# EAGLE board logic (EAGLE 9.5.2)
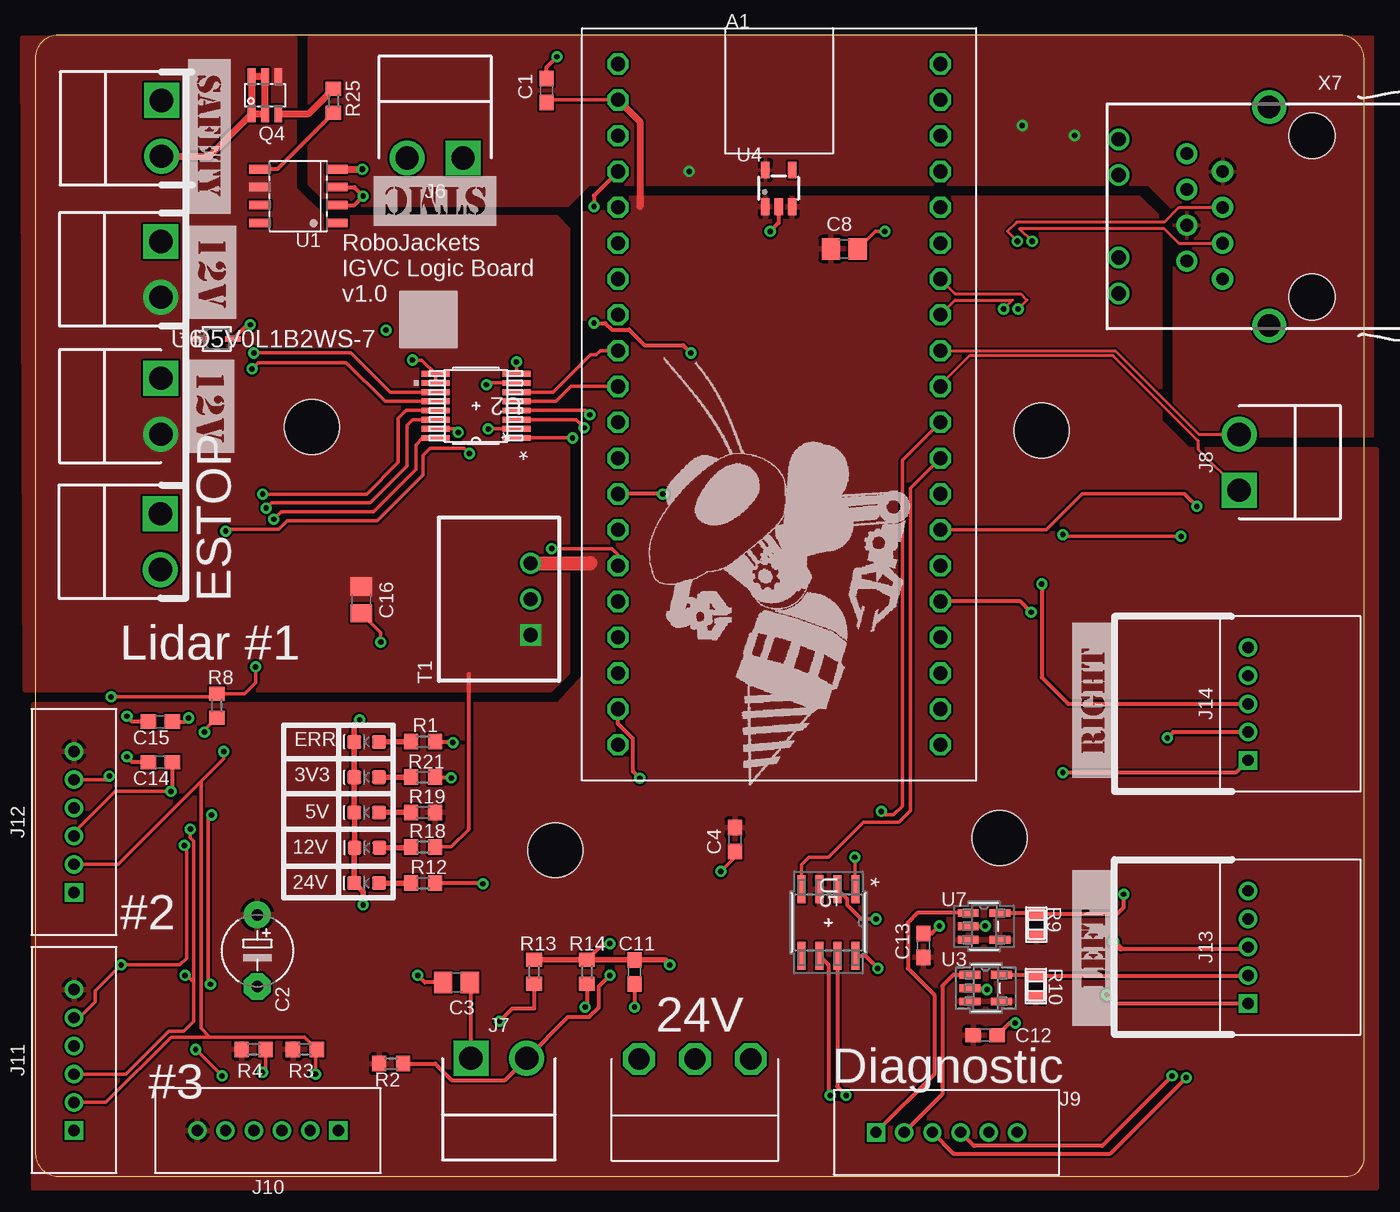
[diagram p0: board, top side]
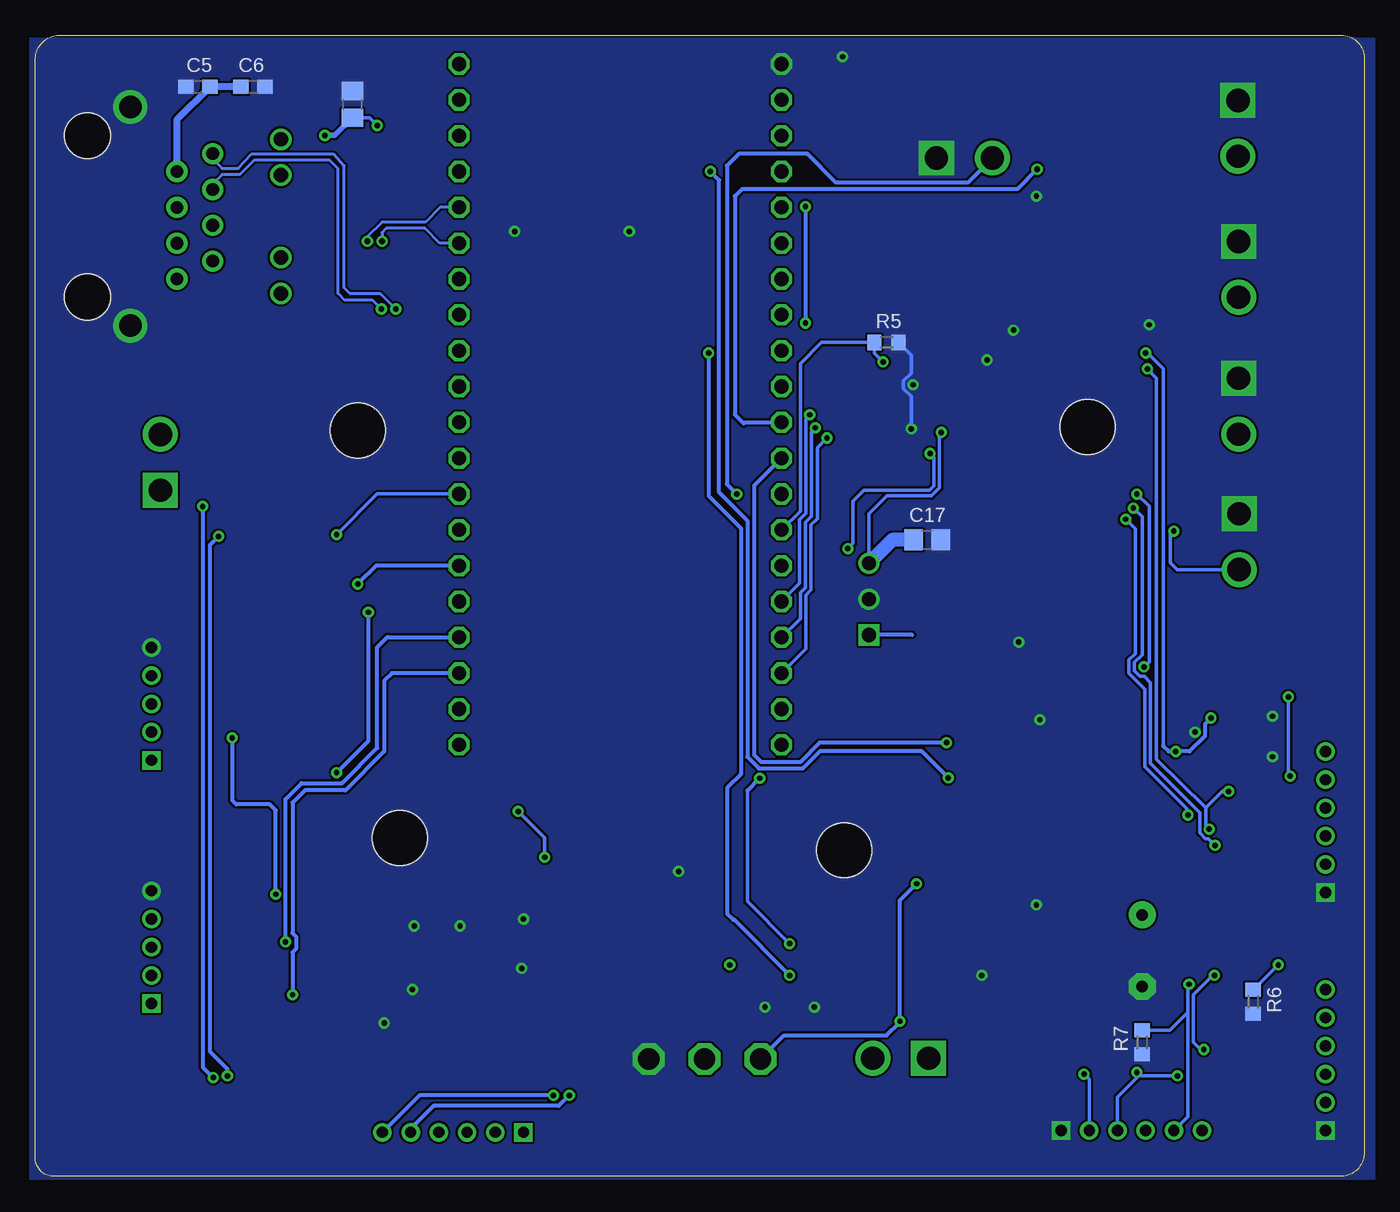
[diagram p1: board, bottom side, seen from below]

Size 94.25 x 80.9 mm. Coordinates in mm from the lower left corner, seen from the top.
Outline: 92.88,0 arc90 94.25,1.25 94.25,79.11 arc90 92.58,80.9 91.8,80.9 1.62,80.9 arc90 0,79.28 0,1.75 arc90 1.62,0 92.88,0
Copper layers (1*16): Top 0.0356mm / dielectric 63mil / Bottom 0.0356mm
Design rules "RJ2LayerDRU": minimum track width 6mil, minimum drill 15mil, track to track 6mil, track to pad 6mil, pad to pad 6mil, via to via 6mil, smd to smd 6mil, copper to edge 0mil, drill to drill 6mil, minimum pad ring 10mil, minimum via ring 8mil, stop-mask expansion 4mil, vias tented up to drill 0mil, thermal gap 10mil

## Footprints (pad centres in the part's own frame; a part is rotated, then mirrored left to right if it is on the bottom)
SPARKFUN-BOARDS_DIL40_0.9 = drill 1 pad 1.397 octagon: 1 -22.86,-11.43; 2 -20.32,-11.43; 3 -17.78,-11.43; 4 -15.24,-11.43; 5 -12.7,-11.43; 6 -10.16,-11.43; 7 -7.62,-11.43; 8 -5.08,-11.43; 9 -2.54,-11.43; 10 0,-11.43; 11 2.54,-11.43; 12 5.08,-11.43; 13 7.62,-11.43; 14 10.16,-11.43; 15 12.7,-11.43; 16 15.24,-11.43; 17 17.78,-11.43; 18 20.32,-11.43; 19 22.86,-11.43; 20 25.4,-11.43; 21 25.4,11.43; 22 22.86,11.43; 23 20.32,11.43; 24 17.78,11.43; 25 15.24,11.43; 26 12.7,11.43; 27 10.16,11.43; 28 7.62,11.43; 29 5.08,11.43; 30 2.54,11.43; 31 0,11.43; 32 -2.54,11.43; 33 -5.08,11.43; 34 -7.62,11.43; 35 -10.16,11.43; 36 -12.7,11.43; 37 -15.24,11.43; 38 -17.78,11.43; 39 -20.32,11.43; 40 -22.86,11.43
C0603 = smd 1.1 x 1: 1 -0.85,0; 2 0.85,0
E5-5 = drill 0.813 pad 1.905: + -2.54,0 | drill 0.813 pad 1.905 octagon: - 2.54,0
C0805 = smd 1.3 x 1.5: 1 -0.95,0; 2 0.95,0
LED-0603 = smd 1 x 1: A -0.877,0; C 0.877,0
S3B-VH = drill 1.5 octagon: 1 1.95,7.2; 2 5.91,7.2; 3 9.87,7.2
B2PS-CENTERED = drill 1.65 square: 1 -1.98,0 | drill 1.65: 2 1.98,0
2MM-6-V = drill 0.8 square: 1 -4,0 | drill 0.8: 2 -2,0; 3 0,0; 4 2,0; 5 4,0; 6 6,0
2MM-5-H = drill 0.8 square: 1 -4,0 | drill 0.8: 2 -2,0; 3 0,0; 4 2,0; 5 4,0
SOT23-6 = smd 0.55 x 1.2: 1 -0.95,-1.3; 2 0,-1.3; 3 0.95,-1.3; 4 0.95,1.3; 5 0,1.3; 6 -0.95,1.3
R0603 = smd 1 x 1.1: 1 -0.85,0; 2 0.85,0
RC0805N-L = smd 0.802 x 1.2: 1 0.519,-0.762; 2 2.021,-0.762
R-78E = drill 1 square: 1 -2.54,0 | drill 1: 2 0,0; 3 2.54,0
SOIC-8 = smd 0.61 x 1.52: 1 -1.905,-2.723; 2 -0.635,-2.723; 3 0.635,-2.723; 4 1.905,-2.723; 5 1.905,2.723; 6 0.635,2.723; 7 -0.635,2.723; 8 -1.905,2.723
PW16-M = smd 1.981 x 0.406: 1 -2.87,2.275; 2 -2.87,1.625; 3 -2.87,0.975; 4 -2.87,0.325; 5 -2.87,-0.325; 6 -2.87,-0.975; 7 -2.87,-1.625; 8 -2.87,-2.275; 9 2.87,-2.275; 10 2.87,-1.625; 11 2.87,-0.975; 12 2.87,-0.325; 13 2.87,0.325; 14 2.87,0.975; 15 2.87,1.625; 16 2.87,2.275
DBV5 = smd 1.473 x 0.559: 1 1.041,-0.574; 2 1.041,-1.524; 3 1.041,-2.474; 4 3.277,-2.474; 5 3.277,-0.574
SOT-23-5 = smd 0.6 x 1.2: 1 -0.95,-1.306; 2 0,-1.306; 3 0.95,-1.306; 4 0.95,1.306; 5 -0.95,1.306
SOIC8-N_MC = smd 1.981 x 0.559: 1 -2.362,1.905; 2 -2.362,0.635; 3 -2.362,-0.635; 4 -2.362,-1.905; 5 2.362,-1.905; 6 2.362,-0.635; 7 2.362,0.635; 8 2.362,1.905
SOD323 = smd 1.111 x 0.401: 1 -1.15,0; 2 1.15,0
STANDOFF-HOLE = hole 3.9: 0,0
SI-50170 = drill 0.9 pad 1.5: 1 4.445,5.842; 2 3.175,3.302; 3 1.905,5.842; 4 0.635,3.302; 5 -0.635,5.842; 6 -1.905,3.302; 7 -3.175,5.842; 8 -4.445,3.302 | drill 1.016 pad 1.5: A1 -5.461,10.668; A2 2.921,10.668; C1 -2.921,10.668; C2 5.461,10.668 | drill 1.6 pad 2.2: S1 -7.747,0; S2 7.747,0 | hole 3.251: -5.715,-3.048; 5.715,-3.048

## Placement (x,y rotation side)
A1  MBED1768  [SPARKFUN-BOARDS_DIL40_0.9]  52.76,56 270 top
C1  0.1uF  [C0603]  36.26,77 90 top
C2  680uF  [E5-5]  15.75,16 270 top
C3  1uF  [C0805]  29.88,13.75 180 top
C4  0.1uF  [C0603]  49.62,23.88 270 top
C5  0.1uF  [C0603]  82.7,77.25 180 bottom
C6  0.1uF  [C0603]  78.81,77.25 0 bottom
C8  10uF  [C0805]  57.38,65.75 0 top
C10  1uF  [C0805]  71.75,76 90 bottom
C11  0.1uF  [C0603]  42.5,14.5 270 top
C12  0.1uF  [C0603]  67.38,10 0 top
C13  0.1uF  [C0603]  63,16.38 90 top
C14  0.1uF  [C0603]  8.88,29.38 180 top
C15  0.1uF  [C0603]  8.88,32.25 180 top
C16  10uF  [C0805]  23.12,40.88 270 top
C17  10uF  [C0805]  31,45.13 0 bottom
D1  RED  [LED-0603]  23.5,30.8 180 top
D2  GREEN  [LED-0603]  23.5,20.8 180 top
D3  GREEN  [LED-0603]  23.52,23.3 180 top
D4  GREEN  [LED-0603]  23.5,25.8 180 top
D5  GREEN  [LED-0603]  23.5,28.3 180 top
J1  S3B-VH  [S3B-VH]  40.88,1.13 0 top
J2  B2PS-VH(LF)(SN)  [B2PS-CENTERED]  8.96,74.3 270 top
J3  B2PS-VH(LF)(SN)  [B2PS-CENTERED]  8.9,64.3 270 top
J4  B2PS-VH(LF)(SN)  [B2PS-CENTERED]  8.9,54.6 270 top
J5  B2PS-VH(LF)(SN)  [B2PS-CENTERED]  8.88,45 270 top
J6  B2PS-VH(LF)(SN)  [B2PS-CENTERED]  28.36,72.2 180 top
J7  B2PS-VH(LF)(SN)  [B2PS-CENTERED]  32.88,8.38 0 top
J8  B2PS-VH(LF)(SN)  [B2PS-CENTERED]  85.38,50.63 90 top
J9  6-PIN_2MM-V  [2MM-6-V]  63.62,3.13 0 top
J10  6-PIN_2MM-V  [2MM-6-V]  17.5,3.25 180 top
J11  6-PIN_2MM-V  [2MM-6-V]  2.75,7.25 90 top
J12  6-PIN_2MM-V  [2MM-6-V]  2.75,24.13 90 top
J13  5-PIN_2MM-H  [2MM-5-H]  86,16.25 90 top
J14  5-PIN_2MM-H  [2MM-5-H]  86,33.5 90 top
Q4  STT4P3LLH6  [SOT23-6]  16.3,76.65 0 top
R1  800  [R0603]  27.5,30.83 0 top
R2  10k  [R0603]  25.25,8 180 top
R3  4.7k  [R0603]  19.12,9 180 top
R4  4.7k  [R0603]  15.5,9 180 top
R5  10k  [R0603]  33.88,59.13 0 bottom
R6  10k  [R0603]  7.88,12.38 90 bottom
R7  10k  [R0603]  15.75,9.5 90 bottom
R8  10k  [R0603]  12.88,33.38 270 top
R9  ERJ-L06KF50MVRC0805N-L  [RC0805N-L]  71.75,19.13 270 top
R10  ERJ-L06KF50MVRC0805N-L  [RC0805N-L]  71.73,14.76 270 top
R12  4.7k  [R0603]  27.5,20.8 0 top
R13  4.7k  [R0603]  35.38,14.5 270 top
R14  510  [R0603]  39.12,14.5 90 top
R18  2.2k  [R0603]  27.5,23.36 0 top
R19  1k  [R0603]  27.5,25.8 0 top
R21  1k  [R0603]  27.5,28.3 0 top
R25  100  [R0603]  21.16,76.25 90 top
T1  R-78E5.0-1.0  [R-78E]  35.13,40.93 90 top
U1  TC4427ACOA713  [SOIC-8]  18.66,69.5 90 top
U2  TXB0106PWRPW16-M  [PW16-M]  31.25,54.63 180 top
U3  INA198AIDBVR  [DBV5]  65.25,14.88 0 top
U4  TLV70233DBVR  [SOT-23-5]  52.73,70.04 0 top
U5  MCP2551T-I/SN  [SOIC8-N_MC]  56.25,18 270 top
U6  D5V0L1B2WS-7  [SOD323]  12.88,59.38 0 top
U7  INA198AIDBVR  [DBV5]  65.12,19.25 0 top
U$1  [STANDOFF-HOLE]  19.63,53.13 0 top
U$2  [STANDOFF-HOLE]  36.88,23.13 0 top
U$3  [STANDOFF-HOLE]  68.38,24 0 top
U$4  [STANDOFF-HOLE]  71.38,52.88 0 top
U$5  [12V]  10.76,67.4 270 top
U$7  [12V]  10.63,57.9 270 top
U$10  [ROBOBUZZ_1.4X]  50.6,27.73 0 top
U$12  [SAFETY]  10.86,79.2 270 top
U$13  [LEFT]  76.53,10.68 90 top
U$14  [RIGHT]  76.53,28.28 90 top
U$16  [STMC]  32.66,70.9 180 top
X7  SI-50170  [SI-50170]  87.5,68.07 90 top

## Library data of the parts
A1 = MotorBoardDev; PROD_ID: COMP-12167
C1-C6 C8 C10-C17 = rcl; SPICEPREFIX: C
D1-D3 = SparkFun-LED; PROD_ID: DIO-08575
D4 D5 = SparkFun-LED; PROD_ID: DIO-00821
J1 = IGVC-Connector
J2-J8 = RoboJackets-Connectors; DIGIKEY: 455-1648-ND; MPN: B2PS-VH(LF)(SN)
J9-J12 = RoboJackets-Connectors; PINS: 6; PIN_PITCH: 2.0 mm
J13 J14 = RoboJackets-Connectors; PINS: 5; PIN_PITCH: 2.0 mm
Q4 T1 U1 U$1-U$5 U$7 U$12-U$14 U$16 = MotorBoardDev
R1-R8 R12-R14 R18 R19 R21 R25 = rcl; SPICEPREFIX: R
R9 R10 = IGVC-Discrete; MANUFACTURER_PART_NUMBER: ERJL06KF50MV; VENDOR: Panasonic
U2 = IGVC-IC; MANUFACTURER_PART_NUMBER: TXB0106PWR; VENDOR: Texas Instruments
U3 U7 = IGVC-Sensor; MANUFACTURER_PART_NUMBER: INA198AIDBVR; VENDOR: Texas Instruments
U4 = RoboJackets-PowerICs; DIGIKEY: 296-32415-1-ND; MPN: TLV70233DBVR
U5 = IGVC-Microcontroller; MANUFACTURER_PART_NUMBER: MCP2551TISN; VENDOR: Microchip
U6 = IGVC-Discrete; BUILT_BY: EMA_UL_Team; MANUFACTURER_PART_NUMBER: D5V0L1B2WS-7; VENDOR: Diodes Inc
U$10 = RoboJackets-Aesthetics
X7 = con-stewart; OC_FARNELL: unknown; OC_NEWARK: unknown

## Nets
3V3_LED_R: D5.A R21.1
5V_LED_R: D4.A R19.1
12V_LED_R: D3.A R18.1
+3V3: C5.1 C6.1 C10.1 R21.2 U4.5 X7.2 X7.5
+5V: A1.2 C1.1 C2.+ C4.1 C8.1 C12.1 C13.1 C17.1 J10.6 J11.6 J12.6 R2.2 R3.2 R4.2 R9.2 R10.2 R19.2 T1.3 U2.15 U3.3 U3.4 U4.1 U4.3 U5.3 U7.3 U7.4
+5V_ENCODER1: J14.2 R9.1 U7.5
+5V_ENCODER2: J13.2 R10.1 U3.5
+12V: C16.1 J3.2 J4.2 Q4.4 R18.2 T1.1 U1.6 U6.1
+24V: J1.1 R12.2 R13.2
BATTIN: A1.19 C11.1 R13.1 R14.2
CAN_N: J9.5 U5.6
CAN_P: J9.6 U5.7
DIAG_RX: A1.28 J9.4
DIAG_TX: A1.27 J9.3
ENCODER1_SENSE: J9.1 U7.1
ENCODER2_SENSE: J9.2 U3.1
ESTOP: A1.15 J5.2
GND: A1.1 C1.2 C2.- C3.2 C4.2 C5.2 C6.2 C8.2 C10.2 C11.2 C12.2 C13.2 C14.2 C15.2 C16.2 C17.2 D1.C D2.C D3.C D4.C D5.C J1.3 J2.1 J3.1 J4.1 J5.1 J6.1 J10.1 J11.1 J12.1 J13.5 J14.5 R5.2 R6.1 R7.1 R8.2 R14.1 T1.2 U1.2 U1.3 U2.2 U2.7 U2.9 U2.10 U3.2 U4.2 U5.2 U5.8 U6.2 U7.2 X7.S1 X7.S2
INDICATOR_LED: A1.12 R1.2
INT1_ACCEL: A1.5
INT2_ACCEL: A1.6
INT3_GYRO: A1.7
INT4_GYRO: A1.8
LEA: A1.24 J13.3
LEB: A1.23 J13.1
LIDAR_EN_1_3V3: A1.16 U2.4
LIDAR_EN_1_5V: J12.5 R8.1 U2.13
LIDAR_EN_2_3V3: A1.17 U2.3
LIDAR_EN_2_5V: J11.5 R6.2 U2.14
LIDAR_EN_3_3V3: A1.18 U2.1
LIDAR_EN_3_5V: J10.5 R7.2 U2.16
LVL_SHIFT_OE: A1.14 R5.1 U2.8
MBED_CAN_RD: A1.30 U5.1
MBED_CAN_TD: A1.29 U5.4
MOTOR_CTRL: A1.13 J6.2
N$1: D2.A R12.1
N$2: D1.A R1.1
N$3: C3.1 J7.1
NR: A1.4 J7.2 R2.1
RD_N: A1.36 X7.6
RD_P: A1.35 X7.4
REA: A1.26 J14.3
REB: A1.25 J14.1
SAFETY_HRD: J2.2 Q4.1 Q4.2 Q4.5 Q4.6
SAFETY_LIGHT: R25.1 U1.5
SAFETY_LIGHT_3V3: A1.11 U1.4
SAFETY_R: Q4.3 R25.2
SCL_3V3: A1.10 U2.5
SCL_5V: C14.1 J10.3 J11.3 J12.3 R4.1 U2.12
SDA_3V3: A1.9 U2.6
SDA_5V: C15.1 J10.2 J11.2 J12.2 R3.1 U2.11
STATUS_LED1: A1.32 J8.2
STATUS_LED2: A1.31 J8.1
TD_N: A1.34 X7.3
TD_P: A1.33 X7.1

## Tracks (layer width: path | path; a pad name or v marks a point on that pad's centre or on a via)
3V3_LED_R
  Top 0.4: D5.A R21.1
5V_LED_R
  Top 0.4: D4.A R19.1
12V_LED_R
  Top 0.4: D3.A 26.59,23.3 R18.1
+3V3  (via drill 0.38, 0.4)
  Top 0.3: R21.2 29.45,28.3 v29.5,28.25
  Bottom 0.25: C10.1 70.55,75.05 v70,74.5
  Bottom 0.3: v29.5,28.25 31.38,30.13 38.61,30.13 39.81,28.92 42.94,28.92 43.75,29.74 43.75,46.5 45.75,48.5 45.75,70.63 v46.38,71.25
  Bottom 0.406: C10.1 73,73.8 v73.7,73.8
  Bottom 0.5: C6.1 C5.1 84.2,74.9 X7.2
  pour Top: 78.91,70.35 80.75,68.5 80.75,53.88 82.13,52.5 94.86,52.5 94.86,80.75 19.41,80.75 19.41,70.35 20.93,68.85 37.8,68.85 39.3,70.35
+5V  (via drill 0.38)
  Top 0.25: U2.15 29.75,53 v30,52.75 | C1.1 36.42,76.32 A1.2
  Top 0.5: A1.2 42.88,74.77 42.88,68.75
  Top 1: T1.3 39.34,43.47 39.38,43.5
  Bottom 0.25: v30,52.75 30.12,52.63 30.12,48.81 30.68,48.25 33.84,48.25 35.13,46.97 T1.3
  Bottom 0.3: 35.09,43.5 T1.3
  Bottom 1: C17.1 33.47,45.13 35.09,43.5
  pour Top: -0.12,-0.85 -0.12,33.43 37.12,33.43 39,35.5 39,68.28 39.98,69.35 78.28,69.35 79.75,67.88 79.75,53.5 81.75,51.5 95.11,51.5 95.11,-0.81
+5V_ENCODER1  (via drill 0.38)
  Top 0.3: U7.5 70.92,18.68 R9.1 76.73,18.61 77.2,19.07 v77.2,20 | v80.28,31.09 80.7,31.5 J14.2
  Bottom 0.3: v80.28,31.09 80.28,26.66 80,26.38 77.62,26.38 77.2,25.95 v77.2,20
+5V_ENCODER2
  Top 0.3: U3.5 70.9,14.3 R10.1 85.99,14.24 J13.2
+12V
  Top 0.25: R18.2 29.48,23.36 30.75,24.63
  Top 0.3: 30.75,24.63 30.75,35.63
  Bottom 0.3: 32.05,38.39 T1.1
  pour Top (no thermals): 18.38,80.7 18.38,69.97 20.4,67.95 36.95,67.95 37.76,67.15 37.76,35.75 36.51,34.5 -0.7,34.5 -0.9,80.7
+24V  (via drill 0.38)
  Top 0.3: v31.75,20.75 31.7,20.8 R12.2 | R13.2 35.38,11.9 33.83,11.9 v32.93,11
  Bottom 0.3: v31.75,20.75 32.93,19.57 v32.93,11 32.93,10.94 33.88,10 41.15,10 J1.1
BATTIN  (via drill 0.38)
  Top 0.3: R14.2 40.27,16.5 v40.75,16.5 | v42.88,28.23 42.38,28.72 42.38,31.04 41.33,32.09 A1.19
  Top 0.4: R13.1 R14.2 C11.1 44.65,15.35 v45,15
  Bottom 0.25: v40.75,16.5 43.75,19.5 43.75,27.35
  Bottom 0.3: 43.75,27.35 v42.88,28.23
CAN_N  (via drill 0.38)
  Top 0.3: U5.6 56.24,15.01 56.24,5.89 v56.38,5.75
  Bottom 0.3: v56.38,5.75 57.12,5 66,5 67.62,3.38 J9.5
CAN_P  (via drill 0.38)
  Top 0.3: U5.7 56.88,6.37 v57.5,5.75
  Bottom 0.3: v57.5,5.75 67,5.75 J9.6
DIAG_RX  (via drill 0.38)
  Top 0.25: v81.25,45.38 73,45.38 v72.88,45.5
  Top 0.3: J9.4 66.58,2.17 75.67,2.17 v80.62,7.13
  Bottom 0.25: v72.88,45.5 70,48.38 A1.28
  Bottom 0.3: v81.25,45.38 81.88,44.75 81.88,8.88 80.62,7.63 v80.62,7.13
DIAG_TX  (via drill 0.38)
  Top 0.25: 81.5,48.38 74.25,48.38 71.72,45.84 A1.27
  Top 0.3: v82.38,47.5 81.5,48.38 | v81.62,7 76.25,1.63 65.12,1.63 J9.3
  Bottom 0.3: v82.38,47.5 82.38,7.75 v81.62,7
ENCODER1_SENSE
  Top 0.3: U7.1 62.55,18.68 61.88,18 61.88,14.75 63.75,12.88 63.75,7.25 J9.1
ENCODER2_SENSE
  Top 0.3: U3.1 65.13,14.3 64.33,13.5 64.33,6.63 64.33,6.4 64.33,5.83 J9.2
ESTOP  (via drill 0.38)
  Top 0.25: v13.5,45.75 13.62,45.88 17.25,45.88 17.88,46.5 24.25,46.5 27.5,49.75 27.5,51.13 28,51.63 30.42,51.63 v30.8,51.25 | A1.15 41.33,44.08 40.89,44.51 v36.62,44.51
  Bottom 0.25: J5.2 13.27,43.02 13.75,43.5 13.75,45.5 v13.5,45.75 | v30.8,51.25 30.53,50.98 30.53,48.97 30.85,48.65 35.47,48.65 36.25,47.88 36.25,44.89 v36.62,44.51
GND  (via drill 0.38)
  Top 0.25: C4.2 49.62,22.63 v48.62,21.63 | U2.10 U2.9 27.41,57.88 v26.75,57.88 | U2.7 32.12,56.25 v32,56.13 | R8.2 12,31.65 v12,31.5 | U2.2 v32.12,53 | C16.2 24.5,38.55 v24.5,37.88 | C8.2 59.58,67 v60.25,67
  Top 0.3: U4.2 52.73,67.6 v52.12,67 | C1.2 36.26,78.63 v37,79.38 | U1.3 22.61,70.14 v23.25,69.5 22.61,68.87 U1.2 | R14.1 39.12,12.13 v39,12 | C11.2 v42.5,12 | U3.2 67.4,13.35 v67.5,13.25 | U7.2 66.19,17.75 v67.38,17.75 | C13.2 63.6,17.23 v64.12,17.75 | C12.2 69.1,10.88 v69.5,10.88 | U5.8 58.86,15.64 v59.75,14.75 | U5.2 57.57,19.67 57.57,19.25 58.57,18.25 v59.62,18.25 | U6.2 15.03,60.38 v15.25,60.38 | C14.2 6.88,29.38 v6.5,29.75 | C15.2 6.88,32.25 v6.5,32.63 | C3.2 27.62,13.75 v27.12,14.25
  Top 0.4: v23,32.38 22.62,32 D1.C D5.C D4.C 22.65,25.78 D3.C 22.62,23.28 D2.C 23.25,20.17 v23.25,19.25
  Bottom 0.25: R5.2 32.12,58.23 32.12,56.95 32.67,56.4 32.67,55.85 32.12,55.3 v32.12,53
  other vias: 24.88,60
  pour Bottom (no thermals): -0.7,80.7 -0.7,-0.2 94.62,-0.2 94.62,80.7
INDICATOR_LED  (via drill 0.38)
  Top 0.3: R1.2 29.55,30.83 v29.62,30.75
  Bottom 0.3: v29.62,30.75 38.62,30.75 40,29.38 42.75,29.38 43.25,29.88 43.25,49 A1.12
LEA  (via drill 0.38)
  Top 0.3: 77,16.13 85.88,16.13 J13.3
  Top 0.4: v76.5,16.63 77,16.13
  Bottom 0.3: v76.5,16.63 76.5,26.75 75.38,27.88 72.5,27.88 70,30.38 70,37.5 69.25,38.25 69.22,38.22 A1.24
LEB  (via drill 0.38)
  Top 0.3: J13.1 76.62,12.25 v76,12.88
  Bottom 0.3: A1.23 68.94,35.68 69.5,35.13 69.5,30.13 72.25,27.38 75.12,27.38 76,26.5 76,17.25 75.75,17 75.75,16.13 76,15.88 v76,12.88
LIDAR_EN_1_3V3  (via drill 0.38)
  Top 0.25: U2.4 39.03,54.3 v39.33,54
  Bottom 0.25: v39.33,54 39.6,53.73 39.6,47 40.05,46.55 40.05,42.04 A1.16
LIDAR_EN_1_5V  (via drill 0.38)
  Top 0.25: v15.62,36.13 15.62,35 14.85,34.23 R8.1 12.65,34 v5.38,34 | v16.12,48.38 23.5,48.38 25.75,50.63 25.75,53.75 26.3,54.3 U2.13 | v5.25,28.38 5,28.13 J12.5
  Bottom 0.25: v15.62,36.13 15.25,36.5 15.25,47.5 v16.12,48.38 | v5.38,34 5.38,28.5 v5.25,28.38
LIDAR_EN_2_3V3  (via drill 0.38)
  Top 0.25: U2.3 38.35,53.65 v38.93,53.07
  Bottom 0.25: v38.93,53.07 39.2,52.81 39.2,46.81 39.62,46.38 39.62,41.75 40,41.38 40,39.55 A1.17
LIDAR_EN_2_5V  (via drill 0.38)
  Top 0.25: U2.14 26.77,53.65 26.38,53.25 26.38,50.38 23.75,47.75 16.75,47.75 v16.38,47.38 | v10.58,23.47 10.72,23.33 10.72,15.47 10.25,15 v6.1,15 4.25,13.15 4.25,12.38 3.12,11.25 J11.5
  Bottom 0.25: v10.58,23.47 11.06,23.95 11.28,23.95 11.67,24.35 11.67,25.8 15.15,29.28 15.15,29.58 15.15,29.74 15.15,35 15.61,35.45 15.9,35.45 16.3,35.85 16.3,36.45 15.75,37 15.75,46.75 v16.38,47.38 | R6.2 v6.1,15
LIDAR_EN_3_3V3  (via drill 0.38)
  Top 0.25: U2.1 v38.1,52.35
  Bottom 0.25: A1.18 39.6,37.41 39.6,41.21 39.22,41.58 39.22,46.21 38.79,46.64 38.79,51.66 v38.1,52.35
LIDAR_EN_3_5V  (via drill 0.38)
  Top 0.25: v12.42,13.63 12.25,13.8 12.25,25.38 v12.5,25.63 | v16.91,46.59 17.45,47.13 24,47.13 27,50.13 27,51.88 27.48,52.35 U2.16
  Bottom 0.25: 12.53,11.63 12.53,13.52 v12.42,13.63 | v12.5,25.63 12.5,26 15.56,29.06 15.56,29.91 15.55,29.91 15.55,34.54 16.7,35.68 16.7,36.62 16.25,37.07 16.25,45.92 v16.91,46.59 | 12.53,11.63 13.78,10.38 15.72,10.38 R7.2 | 12.53,11.63 12.53,4.22 J10.5
LVL_SHIFT_OE  (via drill 0.38)
  Top 0.25: v34.12,57.75 U2.8
  Bottom 0.25: v34.12,57.75 34.73,58.35 R5.1 38.5,59.13 40,57.63 40,47.17 A1.14
MBED_CAN_RD  (via drill 0.38)
  Top 0.25: A1.30 61.5,50.78 61.5,26.25 60.88,25.63 60.25,25.63 v60,25.88 | v58.12,22.63 58.12,20.39 U5.1
  Bottom 0.25: v60,25.88 58.12,24 v58.12,22.63
MBED_CAN_TD
  Top 0.25: A1.29 62.05,48.79 62.05,25.93 61.25,25.13 58.75,25.13 56.25,22.63 54.88,22.63 54.34,22.1 U5.4
MOTOR_CTRL  (via drill 0.38)
  Top 0.3: v44.5,48.38 v44.49,48.38 A1.13
  Bottom 0.3: v44.5,48.38 45.2,49.08 45.2,71.65 44.35,72.5 39.5,72.5 37.45,70.45 28.12,70.45 J6.2
N$1
  Top 0.4: D2.A R12.1
N$2
  Top 0.4: D1.A 26.62,30.8 R1.1
N$3
  Top 0.3: J7.1 30.89,13.68 C3.1
NR  (via drill 0.38)
  Top 0.3: v40.75,14.25 39.98,13.48 39.98,11.99 39.29,11.3 37.78,11.3 34.87,8.39 J7.2 33.31,6.84 29.53,6.84 28.37,8 R2.1 | A1.4 39.62,69.54 v39.62,68.75 | v39.62,60.5 40.41,60.5 40.89,60.02 42.12,60.02 43.21,58.93 45.95,58.93 v46.5,58.38
  Bottom 0.3: v40.75,14.25 44.68,18.18 44.73,18.18 45.14,18.59 45.14,27.58 44.2,28.52 44.2,45.95 46.5,48.25 v46.5,58.38 | v39.62,68.75 v39.62,60.5
RD_N  (via drill 0.4)
  Top 0.2: v70.7,66.3 69.81,67.2 80.06,67.2 81.09,66.16 X7.6
  Bottom 0.2: A1.36 65.54,68.7 66.58,67.66 69.66,67.66 70.7,66.61 v70.7,66.3
RD_P  (via drill 0.4 pad 0.3)
  Top 0.2: v69.66,66.3 68.95,67 69.61,67.65 80.06,67.65 81.11,68.7 X7.4
  Bottom 0.2: A1.35 65.56,66.16 66.61,67.21 69.36,67.21 69.66,66.91 v69.66,66.3
REA  (via drill 0.38)
  Top 0.3: v71.38,42 71.38,35.38 73.25,33.5 J14.3
  Bottom 0.3: A1.26 70.08,43.3 v71.38,42
REB  (via drill 0.38)
  Top 0.3: v70.62,40 69.86,40.76 A1.25 | J14.1 85.12,28.63 v72.88,28.63
  Bottom 0.3: v72.88,28.63 70.62,30.88 v70.62,40
SAFETY_HRD
  Top 0.5: J2.2 12.32,72.32 Q4.1 | Q4.1 Q4.2 Q4.5 Q4.6 Q4.1
SAFETY_LIGHT
  Top 0.3: R25.1 17.16,71.41 U1.5
SAFETY_LIGHT_3V3  (via drill 0.4)
  Top 0.5: U1.4 v23.2,71.41 v23.2,71.4
  Bottom 0.3: v23.2,71.4 24.6,70 44.12,70 44.63,69.5 44.63,54 44,53.38 43.91,53.46 A1.11
SAFETY_R
  Top 0.5: Q4.3 19.4,75.35 R25.2
SCL_3V3
  Top 0.25: U2.5 36.95,54.95 38,56 A1.10
SCL_5V  (via drill 0.38)
  Top 0.25: v11,24.63 11,24 11.25,23.75 11.25,13.75 | v15.38,57.25 15.82,57.7 22.05,57.7 24.8,54.95 U2.12 | 11.25,13.75 11.25,11 10.53,10.28 9.46,10.28 6.43,7.25 J11.3 | v10.62,14.25 10.75,14.25 11.25,13.75 | v9.62,27.3 5.65,27.3 2.75,24.39 J12.3 | R4.1 16.35,7.6 v16.12,7.38 | v13.25,7.13 v11.38,9
  Top 0.3: C14.1 9.72,27.4 v9.62,27.3
  Bottom 0.25: v11,24.63 11.25,24.88 11.25,26.13 | v15.38,57.25 14.75,56.58 14.75,29.58 11.25,26.13 | v10.62,14.25 10.75,14.25 12.12,12.88 12.12,9.5 11.62,9 v11.38,9 | v9.62,27.3 10.08,27.3 11.25,26.13 | v16.12,7.38 15.94,7.19 | 15.94,7.19 15.88,7.13 v13.25,7.13 | 15.94,7.19 17.5,5.63 J10.3
SDA_3V3
  Top 0.25: U2.6 36.73,55.6 39.37,58.25 39.78,58.25 40.07,58.54 A1.9
SDA_5V  (via drill 0.38)
  Top 0.25: 12.38,9.88 9.62,9.88 5,5.25 J11.2 | 12.38,9.88 11.75,10.5 11.75,28 | 11.75,28 13.38,29.63 v13.38,30.13 | U2.11 25.15,55.6 22.38,58.38 v15.5,58.38 | 12.38,9.88 19.1,9.88 R3.1 20,8.98 19.88,8.85 v19.88,7.25 | J12.2 5.88,22.13 11.75,28
  Top 0.3: C15.1 10.62,32.25 v10.88,32.5
  Bottom 0.25: 14.25,30.5 14.25,57.25 15.38,58.38 v15.5,58.38 | v19.88,7.25 19.5,6.88 J10.2
  Bottom 0.3: 14.25,30.5 13.88,30.13 v13.38,30.13 12.39,30.13 11.3,31.21 11.3,32.07 v10.88,32.5
STATUS_LED1
  Top 0.2: A1.32 76.58,58.54 82.52,52.61 J8.2
STATUS_LED2
  Top 0.2: J8.1 82.5,51.52 82.5,52.13 76.44,58.19 66.25,58.19 64.19,56.12 A1.31
TD_N  (via drill 0.4)
  Top 0.2: v69.69,61.49 70.33,62.13 69.89,62.58 65.23,62.58 A1.34
  Bottom 0.2: X7.3 81.66,70.36 81.01,71.02 79.74,71.02 78.69,72.07 73.4,72.07 72.78,71.45 72.78,62.59 72.31,62.13 70.33,62.13 v69.69,61.49
TD_P  (via drill 0.4)
  Top 0.2: v68.67,61.49 69.31,62.13 65.23,62.13 A1.33
  Bottom 0.2: X7.1 81.66,72.12 81.01,71.47 79.85,71.47 78.9,72.5 73.09,72.5 72.33,71.65 72.33,63 71.91,62.58 69.76,62.58 v68.67,61.49

## Text on the board
tPlace: RoboJackets / IGVC Logic Board / v1.0 | ESTOP | Lidar #1 | ERR | 3V3 | 5V | 12V | 24V | #2 | 24V | Diagnostic | #3